# Altium PCB PCD-disc-pcb.PcbDoc
Units mm, origin at the board's own origin, x right, y up, seen from the top; angles counter-clockwise.
Board outline 168 x 168 mm, 2 copper layers (Top Layer, Bottom Layer); 37 components, 30 nets, 120 pads, 319 vias.
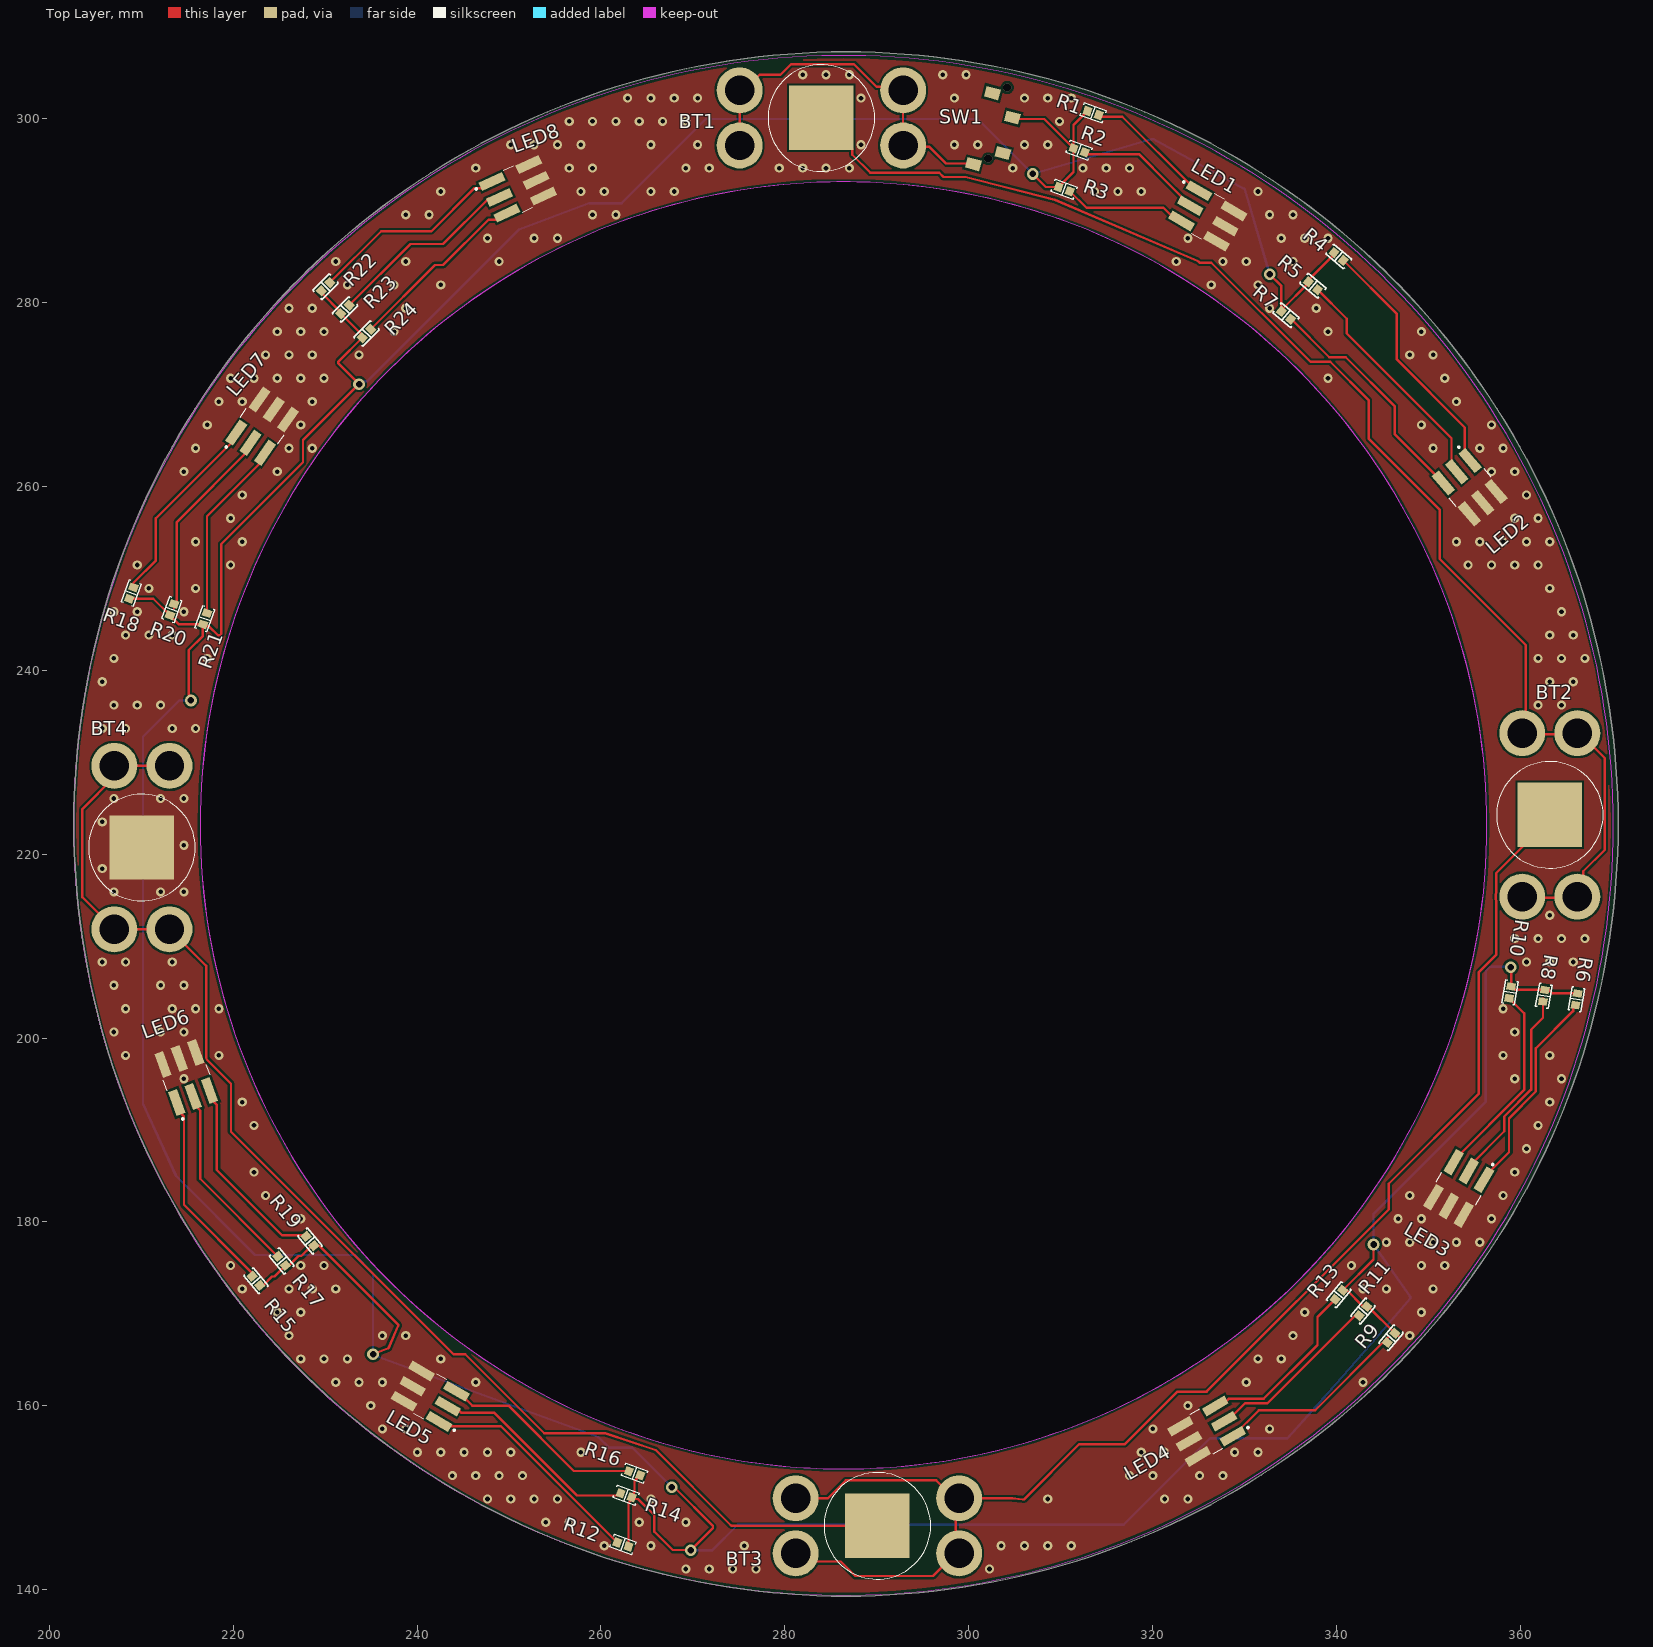
[diagram p0: Top Layer view]
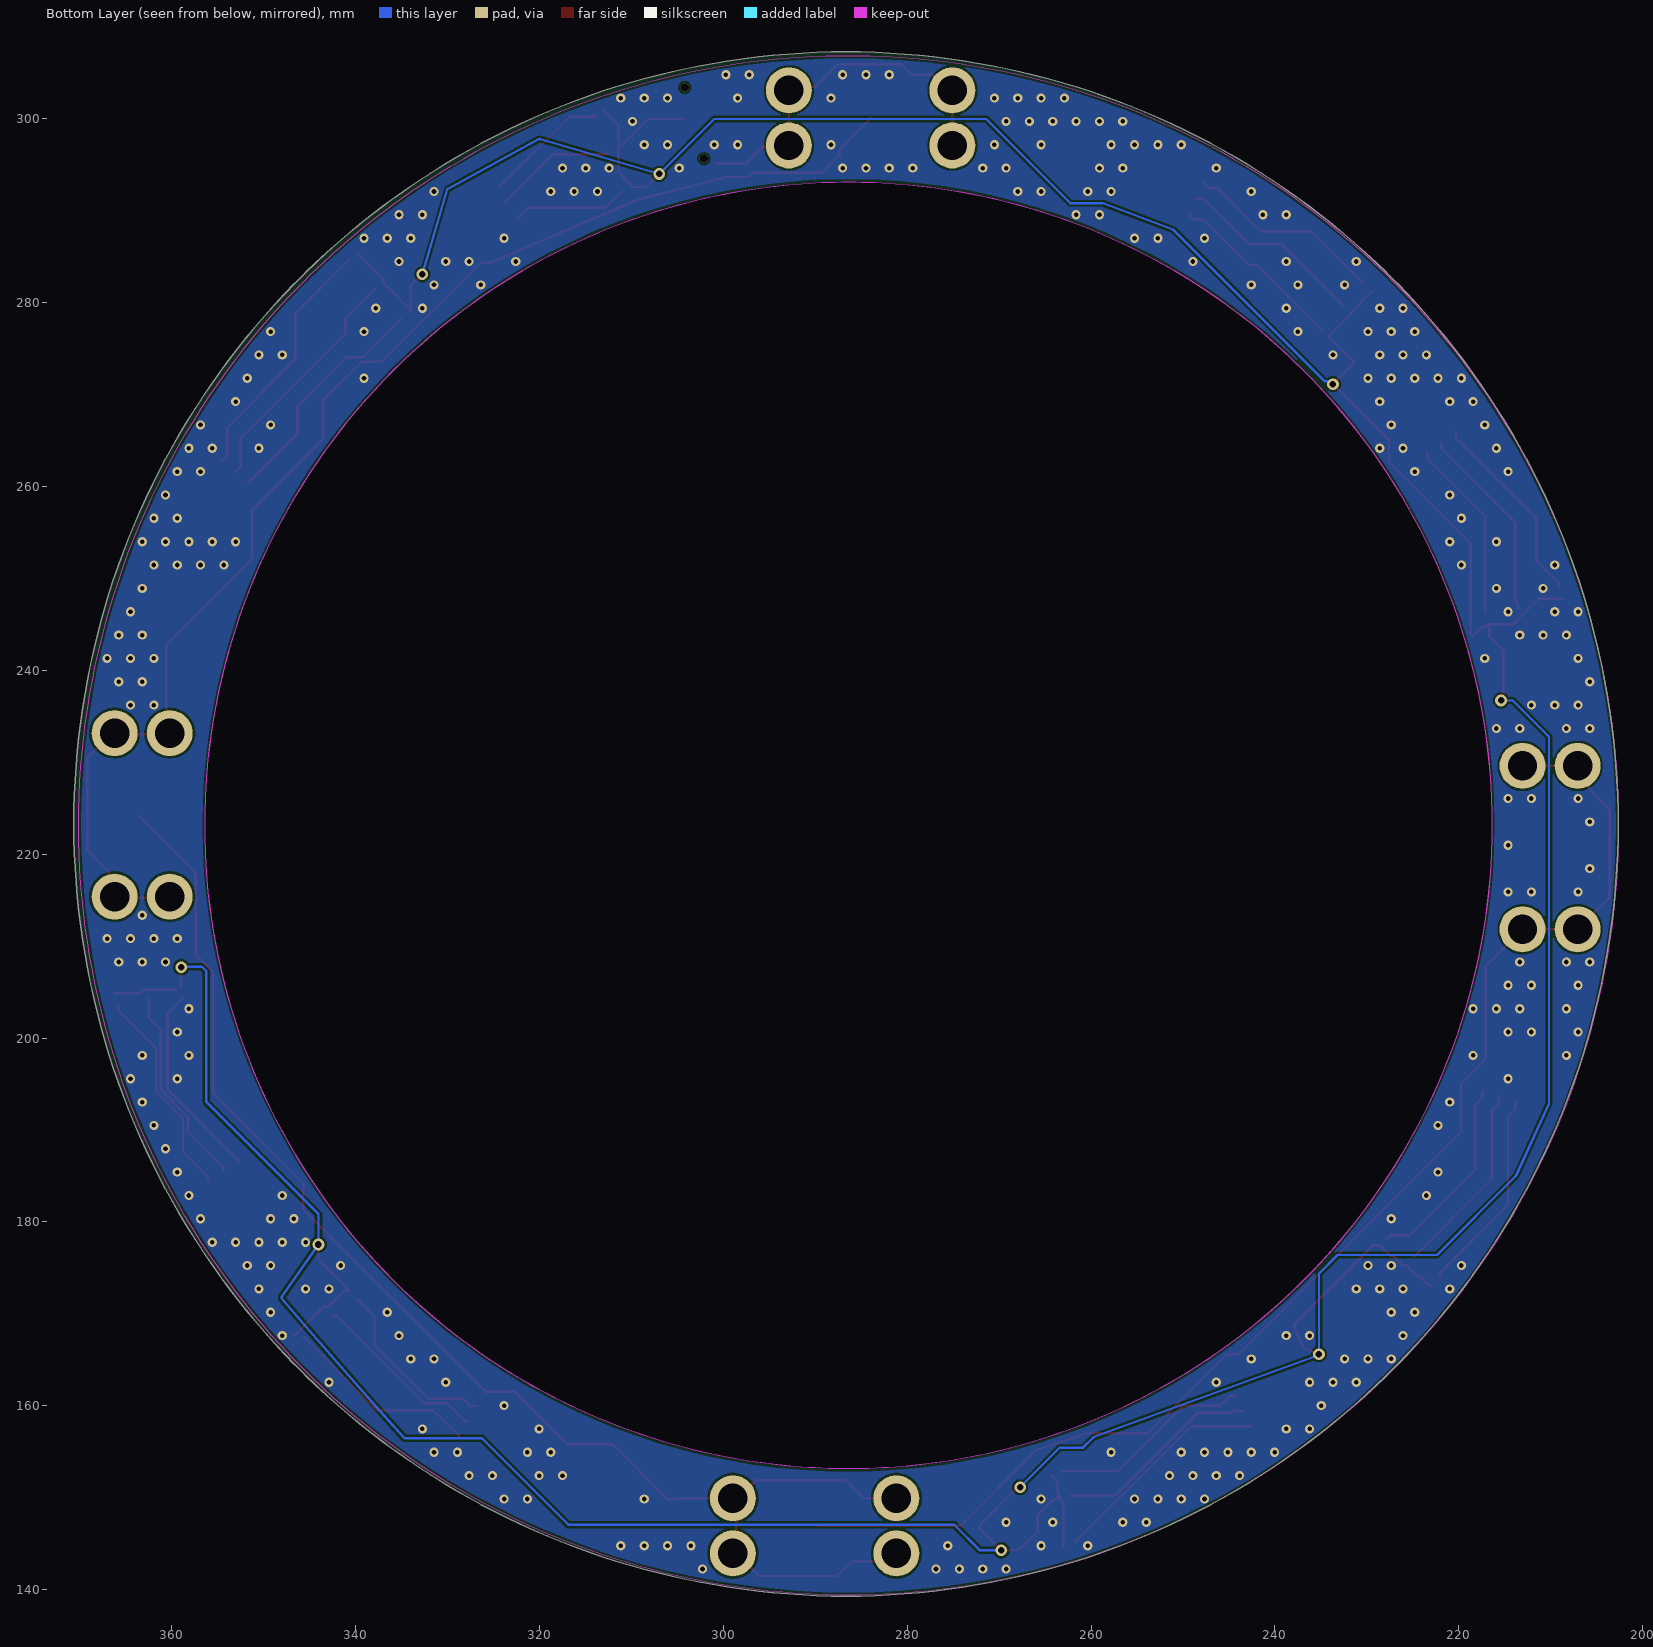
[diagram p1: Bottom Layer view, seen from below]
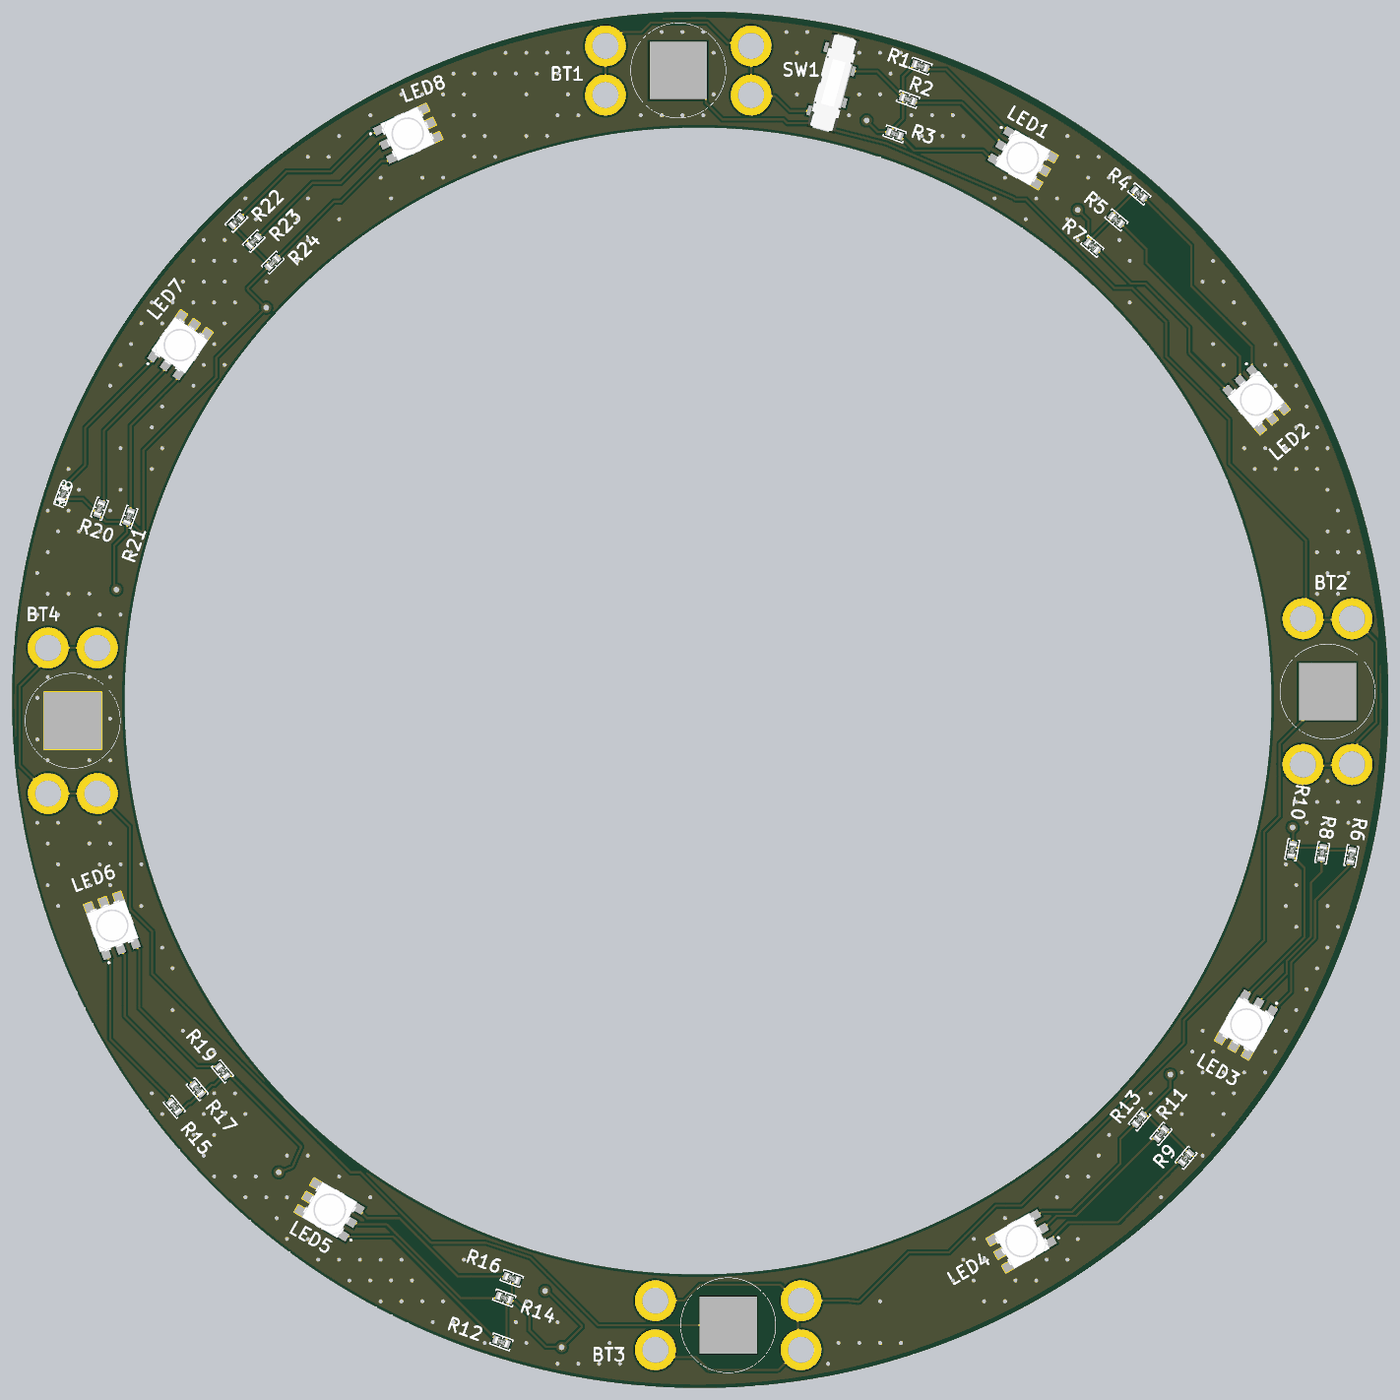
[diagram p2: 3D render of the assembled board from above, using the file's embedded part models]

## Layer stack, top to bottom
Top Solder: solder mask 0.0102, Solder Resist, Dk 3.5
Top Layer: signal copper 0.0356
Dielectric 1: dielectric 0.32, FR-4, Dk 4.8
Bottom Layer: signal copper 0.0356
Bottom Solder: solder mask 0.0102, Solder Resist, Dk 3.5

## Board outline
202.654,223.289 ccw(c286.654,223.289) 286.654,139.289 ccw(c286.654,223.289) 370.654,223.289 ccw(c286.654,223.289) 286.654,307.289 ccw(c286.654,223.289)
cut-out: 216.385,223.139 ccw(c286.385,223.139) 286.385,153.139 ccw(c286.385,223.139) 356.385,223.139 ccw(c286.385,223.139) 286.385,293.139 ccw(c286.385,223.139)

## Design rules (kind name [scope] priority, off if disabled: settings)
Clearance [All] p1: gap=0.254 ignorepadtopadclearanceinfootprint=TRUE except(0: Arc-Hole Track-Hole SMDPad-Hole THPad-Hole Via-Hole Fill-Hole Poly-Hole Region-Hole Text-Hole)
PolygonConnect [All] p1: thpad.connectstyle=Relief thpad.reliefconductorwidth=0.254 thpad.reliefentries=4 thpad.polygonreliefangle="90 Angle" thpad.airgapwidth=0.254 smdpad.connectstyle=Direct smdpad.reliefconductorwidth=0.254 smdpad.reliefentries=4 smdpad.polygonreliefangle="90 Angle" smdpad.airgapwidth=0.254 via.connectstyle=Direct via.reliefconductorwidth=0.254 via.reliefentries=4 via.polygonreliefangle="90 Angle" via.airgapwidth=0.254
RoutingVias [All] p1: holewidth=0.711 width=1.27 viastyle="Through Hole" minholewidth=0.711 minwidth=1.27 maxholewidth=0.711 maxwidth=1.27
SolderMaskExpansion [All] p1: expansion=0.102 istentingtop=FALSE
Width [All] p1: maxlimit=0.254 minlimit=0.254 preferedwidth=0.254
30 further rules are at their usual default settings.

## Classes and differential pairs
component class PCD-disc-schematic: LED1 LED2 LED3 LED4 LED5 LED6 LED7 LED8 R1 R2 R3 R4 R5 R6 R7 R8 R9 R10 R11 R12 R13 R14 R15 R16 R17 R18 R19 R20 R21 R22 R23 R24 SW1

## Components (designator, comment, footprint, x,y, rotation, side; value= is the part's Value field where it differs from the comment)
BT1 "V373" V373 283.972,300.101 r180 top
BT2 "V373" V373 363.22,224.282 r90 top
BT3 "V373" V373 290.068,146.939 r180 top
BT4 "V373" V373 210.058,220.726 r90 top
LED1 "150505M173300" 150505M173300 326.009,289.433 r330 top
LED2 "150505M173300" 150505M173300 354.508,259.925 r310 top
LED3 "150505M173300" 150505M173300 353.314,183.642 r240 top
LED4 "150505M173300" 150505M173300 325.882,157.226 r210 top
LED5 "150505M173300" 150505M173300 241.427,161.036 r150 top
LED6 "150505M173300" 150505M173300 214.884,195.707 r110 top
LED7 "150505M173300" 150505M173300 223.139,266.573 r55 top
LED8 "150505M173300" 150505M173300 250.949,292.384 r25 top
R1 "200 Ohms" "RES 0603_1608" 313.539,300.641 r340 top
R2 "240 Ohms" "RES 0603_1608" 312.015,296.577 r340 top
R3 "200 Ohms" "RES 0603_1608" 310.388,292.354 r340 top
R4 "200 Ohms" "RES 0603_1608" 340.243,285.025 r320 top
R5 "240 Ohms" "RES 0603_1608" 337.449,281.85 r320 top
R6 "200 Ohms" "RES 0603_1608" 366.127,204.221 r260 top
R7 "200 Ohms" "RES 0603_1608" 334.518,278.638 r320 top
R8 "240 Ohms" "RES 0603_1608" 362.571,204.602 r260 top
R9 "200 Ohms" "RES 0603_1608" 345.948,167.386 r230 top
R10 "200 Ohms" "RES 0603_1608" 358.902,204.978 r260 top
R11 "240 Ohms" "RES 0603_1608" 342.9,170.307 r230 top
R12 "200 Ohms" "RES 0603_1608" 262.382,144.907 r160 top
R13 "200 Ohms" "RES 0603_1608" 340.27,172.075 r230 top
R14 "240 Ohms" "RES 0603_1608" 262.739,150.273 r160 top
R15 "200 Ohms" "RES 0603_1608" 222.467,173.599 r130 top
R16 "200 Ohms" "RES 0603_1608" 263.652,152.654 r160 top
R17 "240 Ohms" "RES 0603_1608" 225.261,175.758 r130 top
R18 "200 Ohms" "RES 0603_1608" 208.915,248.412 r70 top
R19 "200 Ohms" "RES 0603_1608" 228.346,177.927 r130 top
R20 "240 Ohms" "RES 0603_1608" 213.328,246.61 r70 top
R21 "200 Ohms" "RES 0603_1608" 216.916,245.618 r70 top
R22 "200 Ohms" "RES 0603_1608" 230.045,281.734 r45 top
R23 "240 Ohms" "RES 0603_1608" 232.156,279.273 r45 top
R24 "200 Ohms" "RES 0603_1608" 234.49,276.654 r45 top
SW1 "CL-SB-13A-01T" CL-SB-13A-01T 302.895,298.577 r75 top

## Footprints (in the part's own frame and the unit in brackets; to place one, negate y for a bottom-side part, rotate by r counter-clockwise, add the part's x,y. Pads: shape width x height; smd on the part's side, far side on the other; paste and mask are expansions set on the pad)
150505M173300 [mm]
  rect 2.8x1 smd: 1(-2.2,1.9) 2(2.2,1.9) 3(-2.2,0) 4(2.2,0) 5(-2.2,-1.9) 6(2.2,-1.9)
  silkscreen extent -4.2,-2.5 0.6,2.5, body extent -2.7,-2.5 2.7,2.5, height 1.6
CL-SB-13A-01T [mm]
  rect 1.2x1.6 smd: 1(-4,1.397) 2(-2,-1.4) 3(2,-1.4) 4(4,1.397)
  body extent -6,-1.75 6,1.75, height 5.51
"RES 0603_1608" [mm] "Chip Resistor, 2-Leads, Body 1.60x0.80mm, IPC Medium Density"
  rect 0.85x0.95 smd: 1(-0.65,0) 2(0.65,0)
  silkscreen extent -1.27,-0.7 1.27,0.7, body extent -0.8,-0.4 0.8,0.4, height 0.45
V373 [mm] "V373"
  round 5 hole 3.2: 1(-8.89,3) 2(-8.89,-3) 3(8.89,3) 4(8.89,-3)
  rect 7x7 smd: 5(0,0)
  silkscreen extent -5.8,-5.8 5.8,5.8

## Part data
LED1 LED2 LED3 LED4 LED5 LED6 LED7 LED8: "LED", Manufacturer_Name="Wurth Elektronik", Mouser Part Number=710-150505M173300, Datasheet Link=https://katalog.we-online.de/led/datasheet/150505M173300.pdf, Height=1.8mm, Manufacturer_Part_Number=150505M173300, Mouser Price/Stock=https://www.mouser.co.uk/ProductDetail/Wurth-Elektronik/150505M173300?qs=fAHHVMwC%252Bbi%2FURn4Qu0%2FAA%3D%3D
R1 R3 R4 R6 R7 R9 R10 R12 R13 R15 R16 R18 R19 R21 R22 R24: library part CRCW0603200RFKEAC, "RES 200 OHM 1% 1/10W 0603", Device Package="0603 (1608 Metric)", Manufacturer="Vishay Dale", Operating Temperature="-55°C ~ 155°C", Power (Watts)="0.1W, 1/10W", Supplier Device Package=0603, Supplier Part Number 1=541-4035-1-ND, Temperature Coefficient=±100ppm/°C, Tolerance=±1%, ComponentLink1Description=Datasheet, ComponentLink1URL=http://www.vishay.com/docs/28773/crcwce3.pdf, ComponentLink2Description="DigiKey Link", ComponentLink2URL=https://www.digikey.com/en/products/detail/vishay-dale/CRCW0603200RFKEAC/7928457, Composition="Thick Film", Height - Seated (Max)="0.022\" (0.55mm)", LastUpdated="9/19/2022 1:22:05 PM", Lifecycle Status=Active, Minimum Order=1, Number of Terminations=2, Package / Case="0603 (1608 Metric)", Packaging=CutTape, Part Number=CRCW0603200RFKEAC, Part Status=Active, PartId=12623, Price=0.01, Resistance="200 Ohms", Series=CRCW-C, Supplier 1=DigiKey
R2 R5 R8 R11 R14 R17 R20 R23: library part RMCF0603FT240R, "RES 240 OHM 1% 1/10W 0603", Device Package="0603 (1608 Metric)", Manufacturer="Stackpole Electronics Inc", Operating Temperature="-55°C ~ 155°C", Power (Watts)="0.1W, 1/10W", Ratings=AEC-Q200, Supplier Device Package=0603, Supplier Part Number 1=738-RMCF0603FT240RCT-ND, Temperature Coefficient=±100ppm/°C, Tolerance=±1%, ComponentLink1Description=Datasheet, ComponentLink1URL=https://www.seielect.com/catalog/sei-rmcf_rmcp.pdf, ComponentLink2Description="DigiKey Link", ComponentLink2URL=https://www.digikey.com/en/products/detail/stackpole-electronics-inc/RMCF0603FT240R/1713818, Composition="Thick Film", Features="Automotive AEC-Q200", Height - Seated (Max)="0.022\" (0.55mm)", LastUpdated="9/19/2022 1:22:12 PM", Lifecycle Status=Active, Minimum Order=1, Number of Terminations=2, Package / Case="0603 (1608 Metric)", Packaging=CutTape, Part Number=RMCF0603FT240R, Part Status=Active, PartId=10745, Price=0.01, Resistance="240 Ohms", Series=RMCF, Size / Dimension="0.061\" L x 0.031\" W (1.55mm x 0.80mm)", Supplier 1=DigiKey
SW1: "SWITCH SLIDE SP3T 200MA 12V", Supplier Part Number 1=563-1326-1-ND, Supplier 1=Digi-Key

## Via types
v1: diameter 1, hole 0.5, Top Layer to Bottom Layer, tented both sides, 308 vias
v2: diameter 1.27, hole 0.711, Top Layer to Bottom Layer, tented both sides, 9 vias
v3: diameter 0.9, hole 0.9, Top Layer to Bottom Layer, 2 vias

## Nets (pads, with @x,y where several pads share a name; then routed paths per layer and width w, separated by ;. In a path a pad name is that pad's centre, name@x,y a point inside that pad or via, vN(x,y) a via of type N, cw(c..) or ccw(c..) an arc to the next point about the centre after c; other vN are vias at no path point)
GND: BT4.5 LED1.2 LED1.4 LED1.6 LED2.2 LED2.4 LED2.6 LED3.2 LED3.4 LED3.6 LED4.2 LED4.4 LED4.6 LED5.2 LED5.4 LED5.6 LED6.2 LED6.4 LED6.6 LED7.2 LED7.4 LED7.6 LED8.2 LED8.4 LED8.6
  other v1: 269.24,142.24 271.78,142.24 274.32,142.24 276.86,142.24 302.26,142.24 260.35,144.78 265.43,144.78 275.59,144.78 303.53,144.78 306.07,144.78 308.61,144.78 311.15,144.78 254,147.32 256.54,147.32 264.16,147.32 269.24,147.32 247.65,149.86 250.19,149.86 252.73,149.86 255.27,149.86 265.43,149.86 308.61,149.86 321.31,149.86 323.85,149.86 243.84,152.4 246.38,152.4 248.92,152.4 251.46,152.4 317.5,152.4 320.04,152.4 325.12,152.4 327.66,152.4 240.03,154.94 242.57,154.94 245.11,154.94 247.65,154.94 250.19,154.94 257.81,154.94 318.77,154.94 321.31,154.94 328.93,154.94 331.47,154.94 236.22,157.48 238.76,157.48 320.04,157.48 332.74,157.48 234.95,160.02 323.85,160.02 231.14,162.56 233.68,162.56 236.22,162.56 246.38,162.56 330.2,162.56 342.9,162.56 227.33,165.1 229.87,165.1 232.41,165.1 242.57,165.1 331.47,165.1 334.01,165.1 226.06,167.64 236.22,167.64 238.76,167.64 335.28,167.64 347.98,167.64 224.79,170.18 227.33,170.18 336.55,170.18 349.25,170.18 220.98,172.72 226.06,172.72 228.6,172.72 231.14,172.72 342.9,172.72 345.44,172.72 350.52,172.72 219.71,175.26 227.33,175.26 229.87,175.26 341.63,175.26 349.25,175.26 351.79,175.26 345.44,177.8 347.98,177.8 350.52,177.8 353.06,177.8 355.6,177.8 227.33,180.34 346.71,180.34 349.25,180.34 356.87,180.34 223.52,182.88 347.98,182.88 358.14,182.88 222.25,185.42 359.41,185.42 360.68,187.96 222.25,190.5 361.95,190.5 220.98,193.04 363.22,193.04 214.63,195.58 359.41,195.58 364.49,195.58 208.28,198.12 218.44,198.12 358.14,198.12 363.22,198.12 207.01,200.66 212.09,200.66 214.63,200.66 359.41,200.66 208.28,203.2 213.36,203.2 215.9,203.2 218.44,203.2 358.14,203.2 207.01,205.74 212.09,205.74 214.63,205.74 205.74,208.28 208.28,208.28 213.36,208.28 360.68,208.28 363.22,208.28 365.76,208.28 359.41,210.82 361.95,210.82 364.49,210.82 367.03,210.82 363.22,213.36 207.01,215.9 212.09,215.9 214.63,215.9 205.74,218.44 214.63,220.98 205.74,223.52 207.01,226.06 212.09,226.06 214.63,226.06 205.74,233.68 208.28,233.68 213.36,233.68 215.9,233.68 207.01,236.22 209.55,236.22 212.09,236.22 361.95,236.22 364.49,236.22 205.74,238.76 363.22,238.76 365.76,238.76 207.01,241.3 217.17,241.3 361.95,241.3 364.49,241.3 367.03,241.3 208.28,243.84 210.82,243.84 213.36,243.84 363.22,243.84 365.76,243.84 207.01,246.38 209.55,246.38 214.63,246.38 364.49,246.38 210.82,248.92 215.9,248.92 363.22,248.92 209.55,251.46 219.71,251.46 354.33,251.46 356.87,251.46 359.41,251.46 361.95,251.46 215.9,254 220.98,254 353.06,254 355.6,254 358.14,254 360.68,254 363.22,254 219.71,256.54 359.41,256.54 361.95,256.54 220.98,259.08 360.68,259.08 214.63,261.62 224.79,261.62 356.87,261.62 359.41,261.62 215.9,264.16 226.06,264.16 228.6,264.16 350.52,264.16 355.6,264.16 358.14,264.16 217.17,266.7 227.33,266.7 349.25,266.7 356.87,266.7 218.44,269.24 220.98,269.24 228.6,269.24 353.06,269.24 219.71,271.78 222.25,271.78 224.79,271.78 227.33,271.78 229.87,271.78 339.09,271.78 351.79,271.78 223.52,274.32 226.06,274.32 228.6,274.32 233.68,274.32 347.98,274.32 350.52,274.32 224.79,276.86 227.33,276.86 229.87,276.86 237.49,276.86 339.09,276.86 349.25,276.86 226.06,279.4 228.6,279.4 238.76,279.4 332.74,279.4 337.82,279.4 232.41,281.94 237.49,281.94 242.57,281.94 326.39,281.94 331.47,281.94 231.14,284.48 238.76,284.48 248.92,284.48 322.58,284.48 327.66,284.48 330.2,284.48 335.28,284.48 247.65,287.02 252.73,287.02 255.27,287.02 323.85,287.02 334.01,287.02 336.55,287.02 339.09,287.02 238.76,289.56 241.3,289.56 259.08,289.56 261.62,289.56 332.74,289.56 335.28,289.56 242.57,292.1 257.81,292.1 260.35,292.1 265.43,292.1 267.97,292.1 313.69,292.1 316.23,292.1 318.77,292.1 331.47,292.1 246.38,294.64 256.54,294.64 259.08,294.64 269.24,294.64 271.78,294.64 279.4,294.64 281.94,294.64 284.48,294.64 287.02,294.64 304.8,294.64 312.42,294.64 314.96,294.64 317.5,294.64 250.19,297.18 252.73,297.18 255.27,297.18 257.81,297.18 265.43,297.18 270.51,297.18 288.29,297.18 298.45,297.18 300.99,297.18 306.07,297.18 308.61,297.18 256.54,299.72 259.08,299.72 261.62,299.72 264.16,299.72 266.7,299.72 269.24,299.72 309.88,299.72 262.89,302.26 265.43,302.26 267.97,302.26 270.51,302.26 288.29,302.26 298.45,302.26 306.07,302.26 308.61,302.26 311.15,302.26 281.94,304.8 284.48,304.8 287.02,304.8 297.18,304.8 299.72,304.8
NetBT1_1: BT1.1 BT1.2 BT1.3 BT1.4 SW1.1 | length 41
  Top Layer w0.254: BT1.3 BT1.4 275.548,303.101 277.247,304.8 279.527,304.8 280.67,305.943 287.528,305.943 289.981,303.49 292.473,303.49 BT1.2 BT1.1 293.013,296.95 295.743,296.95 297.545,295.148 SW1.1@300.93,295.148
NetBT1_5: BT1.5 BT2.1 BT2.2 BT2.3 BT2.4 | length 145.9
  Top Layer w0.254: BT1.5 287.345,296.728 287.345,296.093 289.306,294.132 296.799,294.132 297.261,293.67 299.674,293.67 309.34,291.203 309.359,291.198 324.916,284.531 324.996,284.477 325.12,284.353 326.39,284.353 337.176,273.567 339.335,273.567 343.535,269.367 343.535,265.186 351.229,257.493 351.229,252.138 360.601,242.766 360.601,233.045 366.601,233.045 369.189,230.457 369.189,220.472 366.863,218.146 366.863,215.527 366.601,215.265 BT2.1@360.601,215.265
NetBT2_5: BT2.5 BT3.1 BT3.2 BT3.3 BT3.4 | length 155.6
  Top Layer w0.254: BT3.3@280.797,143.939 281.678,143.058 286.075,143.058 287.655,141.478 296.116,141.478 298.577,143.939 BT3.2@298.577,149.939 ; BT3.4@280.797,149.939 284.686,149.939 286.639,151.892 296.456,151.892 298.409,149.939 BT3.2@298.577,149.939 ; BT2.5@363.601,224.155 357.378,217.932 357.378,215.864 ccw(c360.22,215.392) 357.378,214.92 357.378,209.042 355.473,207.137 355.473,193.929 345.694,184.15 345.694,181.356 325.882,161.544 322.707,161.544 316.992,155.829 312.039,155.829 306.017,149.807 305.912,149.807 305.898,149.807 305.884,149.809 304.73,149.939 BT3.2@298.577,149.939
NetBT3_5: BT3.5 BT4.1 BT4.2 BT4.3 BT4.4 | length 144.7
  Top Layer w0.254: BT4.4 BT4.3 207.058,228.394 203.581,224.917 203.581,215.313 BT4.1 BT4.2 216.969,207.925 217.043,207.851 217.043,197.906 217.139,197.643 219.759,195.023 219.759,189.816 243.967,165.608 245.237,165.608 253.828,157.017 260.466,157.017 265.935,155.197 265.978,155.154 274.119,147.013 274.193,146.939 BT3.5@289.687,146.939
NetLED1_1: LED1.1 R1.2 | length 14
  Top Layer w0.254: R1.2@313.79,300.228 R1.2@314.34,300.228 ; R1.2 R1.2@314.34,300.228 ; LED1.1@324.334,292.608 316.714,300.228 R1.2@314.34,300.228
NetLED1_3: LED1.3 R2.2 | length 13.3
  Top Layer w0.254: R2.2 312.816,296.164 318.516,296.164 321.608,293.072 LED1.3@323.723,290.957
NetLED1_5: LED1.5 R3.2 | length 12.4
  Top Layer w0.254: R3.2 312.808,290.322 321.183,290.322 LED1.5@322.199,289.306
NetLED2_1: LED2.1 R4.2 | length 27.5
  Top Layer w0.254: R4.2 346.583,278.765 346.583,273.812 353.971,266.424 353.971,263.41 LED2.1
NetLED2_3: LED2.3 R5.2 | length 26.1
  Top Layer w0.254: R5.2 341.122,278.257 341.122,276.64 352.516,265.247 352.516,262.189 LED2.3
NetLED2_5: LED2.5 R7.2 | length 25.8
  Top Layer w0.254: R7.2 335.08,278.22 339.226,274.075 341.011,274.075 346.363,268.722 346.363,265.665 LED2.5
NetLED3_1: LED3.1 R6.2 | length 23.1
  Top Layer w0.254: LED3.1 356.059,184.863 358.775,187.579 358.775,191.262 361.696,194.183 361.696,198.882 365.75,202.936 365.75,203.317 R6.2
NetLED3_3: LED3.3 R8.2 | length 22.1
  Top Layer w0.254: LED3.3 354.414,186.012 358.267,189.865 358.267,191.472 361.188,194.393 361.188,200.914 362.486,202.212 R8.2@362.486,204.333
NetLED3_5: LED3.5 R10.2 | length 21.7
  Top Layer w0.254: LED3.5 352.769,186.692 360.426,194.35 360.426,202.701 R10.2
NetLED4_1: LED4.1 R9.2 | length 21.4
  Top Layer w0.254: LED4.1 331.569,159.512 337.693,159.512 345.3,167.119 345.63,167.449 345.648,167.434
NetLED4_3: LED4.3 R11.2 | length 19.5
  Top Layer w0.254: LED4.3 328.117,158.326 330.065,160.274 332.51,160.274 342.045,169.809 R11.2
NetLED4_5: LED4.5 R13.2 | length 19.6
  Top Layer w0.254: LED4.5 327.511,159.971 328.321,160.782 332.105,160.782 337.947,166.624 337.947,169.672 R13.2
NetLED5_1: LED5.1 R12.2 | length 24.5
  Top Layer w0.254: LED5.1@242.509,157.783 249.118,157.783 R12.2
NetLED5_3: LED5.3 R14.2 | length 22.5
  Top Layer w0.254: LED5.3@243.459,159.428 244.595,159.428 244.765,159.258 248.361,159.258 257.378,150.241 261.544,150.241 261.55,150.247 262.152,150.247 R14.2@262.157,150.241
NetLED5_5: LED5.5 R16.2 | length 22.2
  Top Layer w0.254: LED5.5@244.409,161.073 244.937,161.073 245.99,160.02 249.936,160.02 257.048,152.908 R16.2@263.181,152.908
NetLED6_1: LED6.1 R15.2 | length 22.3
  Top Layer w0.254: LED6.1 213.851,192.26 214.63,191.481 214.63,181.864 222.049,174.445 R15.2
NetLED6_3: LED6.3 R17.2 | length 21.2
  Top Layer w0.254: LED6.3 215.636,192.903 216.408,192.131 216.408,184.691 R17.2
NetLED6_5: LED6.5 R19.2 | length 21.7
  Top Layer w0.254: LED6.5 217.422,193.545 218.186,192.781 218.186,185.674 225.298,178.562 227.457,178.562 R19.2@227.838,178.181
NetLED7_1: LED7.1 R18.2 | length 21.5
  Top Layer w0.254: R18.2 209.137,249.523 211.582,251.968 211.582,256.54 220.321,265.279 LED7.1
NetLED7_3: LED7.3 R20.2 | length 21.5
  Top Layer w0.254: 213.551,246.707 R20.2 213.868,247.538 213.868,256.147 221.877,264.156 LED7.3
NetLED7_5: LED7.5 R21.2 | length 20.1
  Top Layer w0.254: R21.2 217.138,256.771 223.434,263.066 LED7.5
NetLED8_1: LED8.1 R22.2 | length 21.7
  Top Layer w0.254: R22.2 236.093,287.782 241.554,287.782 246.237,292.465 247.157,292.465 LED8.1@247.726,293.034
NetLED8_3: LED8.3 R23.2 | length 20.7
  Top Layer w0.254: R23.2 239.268,286.385 242.824,286.385 247.751,291.312 LED8.3@248.529,291.312
NetLED8_5: LED8.5 R24.2 | length 19.6
  Top Layer w0.254: R24.2 241.935,284.099 242.824,284.099 247.757,289.032 248.774,289.032 LED8.5@249.332,289.591
NetR1_1: R1.1 R2.1 R3.1 R4.1 R5.1 R6.1 R7.1 R8.1 R9.1 R10.1 R11.1 R12.1 R13.1 R14.1 R15.1 R16.1 R17.1 R18.1 R19.1 R20.1 R21.1 R22.1 R23.1 R24.1 SW1.3 | length 562.4
  Top Layer w0.254: R18.1 211.304,247.801 R20.1 214.098,245.007 R21.1 ; v2(215.392,236.728) 215.198,236.922 215.198,237.325 215.138,237.385 215.138,242.189 216.694,243.745 R21.1 ; R15.1 223.258,173.101 224.218,174.061 224.48,174.061 R17.1 226.052,175.26 227.086,176.294 227.401,176.294 228.556,177.448 228.727,177.448 228.732,177.444 R19.1@228.731,177.432 ; R19.1 229.235,177.429 229.34,177.429 237.933,168.836 237.933,168.678 236.904,166.318 236.832,166.247 236.783,166.228 v2(235.204,165.608) ; R22.1 229.586,281.081 R23.1@231.775,278.892 ; R23.1 234.031,276.479 R24.1 231.436,273.6 231.436,273.389 v2(233.68,271.145) 227.584,265.049 227.584,262.636 218.694,253.746 218.694,243.967 218.545,243.818 218.335,243.818 217.364,244.789 216.912,244.789 R21.1 ; R12.1 262.993,149.447 263.35,149.804 R14.1 263.568,150.05 R14.1@263.601,150.017 ; R14.1@263.534,149.949 R14.1@263.601,150.017 ; R16.1 263.652,151.821 263.652,150.599 263.568,150.515 263.568,150.151 263.652,150.067 R14.1@263.601,150.017 ; v2(267.716,151.13) 267.97,151.13 272.183,146.917 272.183,146.707 v2(269.748,144.272) 269.704,144.316 267.799,144.316 265.811,146.304 265.811,148.082 264.026,149.867 263.751,149.867 R14.1@263.601,150.017 ; SW1.3@304.192,299.974 308.229,299.974 R2.1 ; v2(306.959,294.005) 308.388,292.576 R3.1 311.404,294.203 R2.1 ; R1.1 311.404,299.339 R2.1 ; v2(332.74,283.083) 334.02,281.803 334.02,279.598 334.052,279.566 R7.1@334.052,279.228 ; R7.1 334.052,279.088 R7.1@334.052,279.228 ; R4.1 339.745,285.252 336.951,282.458 R5.1 336.951,282.127 R7.1@334.052,279.228 ; v2(344.043,177.546) 344.043,175.928 R13.1 341.142,172.573 342.91,170.805 R11.1 343.445,170.805 R9.1 346.62,167.63 R9.1@346.747,167.63 ; v2@358.902,207.772 v2(358.958,207.716) 359.015,207.659 R10.1 ; 359.505,205.242 R8.1 363.123,205.242 363.504,204.861 R6.1
  Bottom Layer w0.254: v2(215.392,236.728) 214.122,236.728 210.177,232.783 210.177,192.92 210.177,192.866 213.735,185.067 213.774,185.012 213.787,184.993 222.377,176.403 233.172,176.403 235.204,174.371 v2(235.204,165.608) 235.353,165.459 259.715,156.591 259.789,156.517 260.858,155.448 263.398,155.448 v2(267.716,151.13) ; v2@233.638,271.441 233.74,271.339 234.149,271.339 234.251,271.441 234.552,271.441 251.071,287.959 258.767,290.83 262.255,290.83 271.407,299.982 300.982,299.982 v2(306.959,294.005) 319.933,297.795 319.968,297.805 320.004,297.805 320.069,297.805 329.974,292.378 330.046,292.307 330.064,292.244 v2(332.74,283.083) ; v2(269.748,144.272) 272.086,144.272 274.872,147.058 281.178,147.058 308.228,147.058 316.857,147.058 326.263,156.464 334.684,156.464 ccw(c-210.299,648.533) 348.037,171.669 348.037,171.763 348.037,171.843 347.991,171.909 v2(344.043,177.546) 344.043,180.848 356.235,193.04 356.235,207.264 356.743,207.772 v2@358.902,207.772
pads on no net: SW1.2 SW1.4
copper on no net:
  other v3: 302.119,295.679 304.189,303.407

## Polygon pours and split planes (outlines as drawn)
GND on Bottom Layer "GND_L02_P000" (solid, remove dead copper, pour order 0): 169.037,343.535 176.657,335.915 380.492,335.915 380.492,130.302 384.937,125.857 191.897,125.857 191.897,221.996 169.799,244.094
GND on Top Layer "GND_L01_P001" (solid, remove dead copper, pour order 1): 142.803,400.319 472.385,300.467 523.185,52.309 243.785,52.309

## Keep-outs
Keep-Out Layer:
  circle w0.1: c286.385,223.139 r83.75
  circle w0.1: c286.385,223.139 r70

## Silkscreen, mask and mechanical layers (free items; w line width, h text height)
Mechanical 1:
  circle w0.013: c286.654,223.289 r84